# Altium PCB drv8305_instaspin_driver_adapter.PcbDoc
Units mm, origin at the board's own origin, x right, y up, seen from the top; angles counter-clockwise.
Board outline 82 x 47 mm, 2 copper layers (Top Layer, Bottom Layer), stack 1.571 mm thick; 56 components, 19 nets, 62 pads, 329 vias.
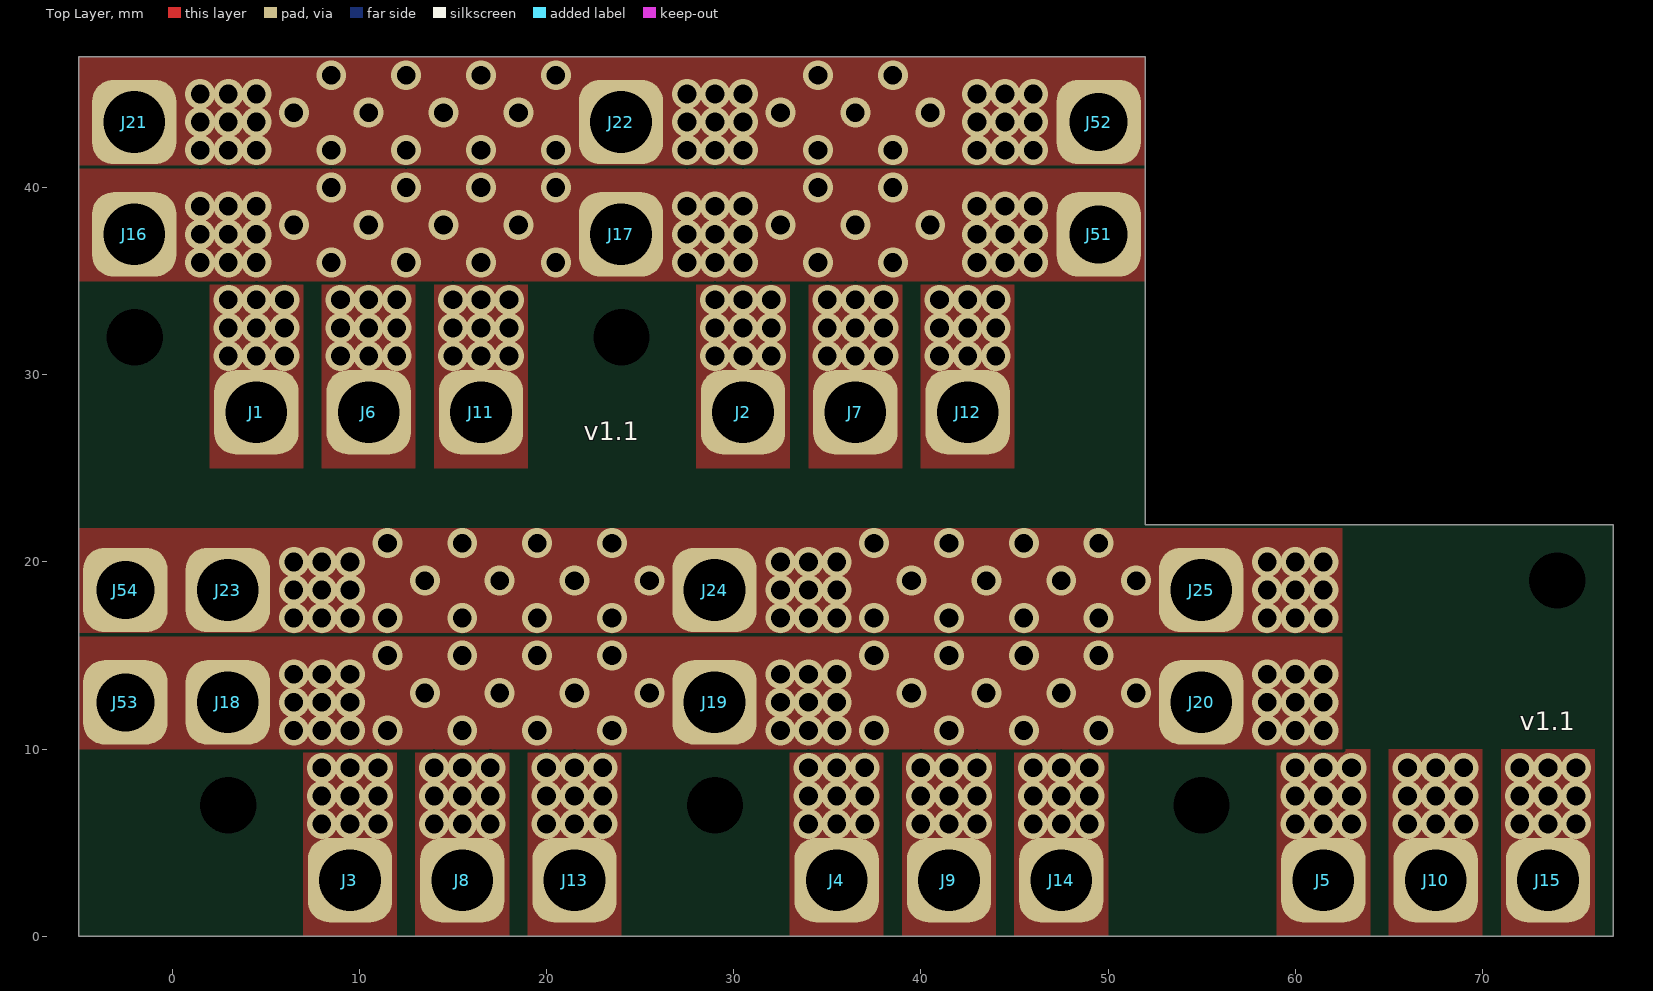
[diagram p0: Top Layer view]
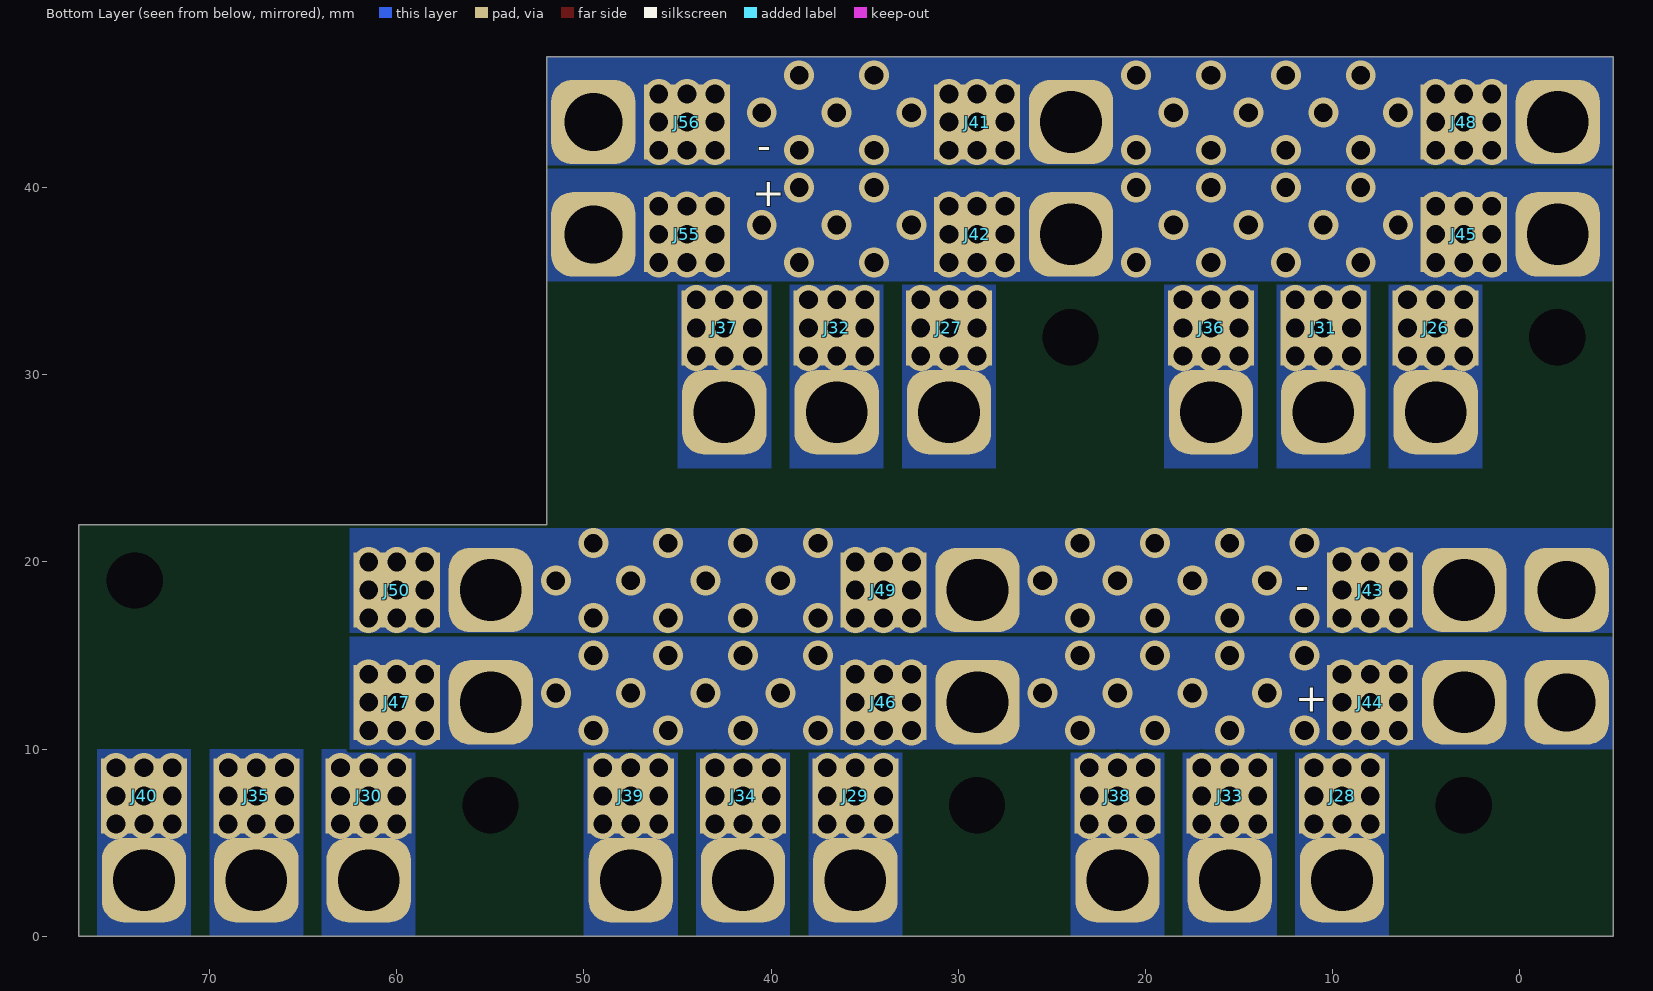
[diagram p1: Bottom Layer view, seen from below]

## Layer stack, top to bottom
Top Solder: solder mask 0.0102, Solder Resist, Dk 3.5
Top Layer: signal copper 0.0356
Dielectric 1: dielectric 1.5, FR-4, Dk 4.8
Bottom Layer: signal copper 0.0356
Bottom Solder: solder mask 0.0102, Solder Resist, Dk 3.5

## Board outline
-5,0 -5,47 52,47 52,22 77,22 77,0

## Design rules (kind name [scope] priority, off if disabled: settings)
Clearance ClearanceKeepOut [All vs OnLayer('Keep-Out Layer')] p1: gap=0.1 ignorepadtopadclearanceinfootprint=FALSE
Clearance [All] p2: gap=0.2 ignorepadtopadclearanceinfootprint=FALSE
HoleSize [All] p1: absolutevalues=TRUE maxlimit=5 minlimit=0.3 maxpercent=80.000 minpercent=20.000
PolygonConnect [All] p1: connectstyle=Direct reliefconductorwidth=0.254 reliefentries=4 polygonreliefangle="90 Angle" airgapwidth=0.254
RoomDefinition drv8305_instaspin_driver_adapter [InComponentClass('drv8305_instaspin_driver_adapter')] p1: confinementstyle=ConfineIn formatcopy=TRUE lockcomponents=FALSE outline -5,0 77,0 77,47 -5,47
RoutingVias [All] p1: holewidth=1 width=1.6 viastyle="Through Hole" minholewidth=0.3 minwidth=0.6 maxholewidth=5 maxwidth=10
SolderMaskExpansion SolderMaskExpansionVia [IsVia And (Not IsTestpoint)] p1: expansion=-5
SolderMaskExpansion [All] p2: expansion=0.1
Width [All] p1: maxlimit=10 minlimit=0.2 preferedwidth=1 minimp=50.000000 maximp=50.000000 favimp=50.000000
29 further rules are at their usual default settings.

## Components (designator, comment, footprint, x,y, rotation, side; value= is the part's Value field where it differs from the comment)
J1 "M1A" 2MM-BULLET-PLUG-VIA 4.5,28 r0 top
J2 "M2A" 2MM-BULLET-PLUG-VIA 30.5,28 r0 top
J3 "M3A" 2MM-BULLET-PLUG-VIA 9.5,3 r0 top
J4 "M4A" 2MM-BULLET-PLUG-VIA 35.5,3 r0 top
J5 "M5A" 2MM-BULLET-PLUG-VIA 61.5,3 r0 top
J6 "M1B" 2MM-BULLET-PLUG-VIA 10.5,28 r0 top
J7 "M2B" 2MM-BULLET-PLUG-VIA 36.5,28 r0 top
J8 "M3B" 2MM-BULLET-PLUG-VIA 15.5,3 r0 top
J9 "M4B" 2MM-BULLET-PLUG-VIA 41.5,3 r0 top
J10 "M5B" 2MM-BULLET-PLUG-VIA 67.5,3 r0 top
J11 "M1C" 2MM-BULLET-PLUG-VIA 16.5,28 r0 top
J12 "M2C" 2MM-BULLET-PLUG-VIA 42.5,28 r0 top
J13 "M3C" 2MM-BULLET-PLUG-VIA 21.5,3 r0 top
J14 "M4C" 2MM-BULLET-PLUG-VIA 47.5,3 r0 top
J15 "M5C" 2MM-BULLET-PLUG-VIA 73.5,3 r0 top
J16 "M1_16V" 2MM-BULLET-PLUG-VIA -2.025,37.5 r0 top
J17 "M2_16V" 2MM-BULLET-PLUG-VIA 23.975,37.5 r0 top
J18 "M3_16V" 2MM-BULLET-PLUG-VIA 2.975,12.5 r0 top
J19 "M4_16V" 2MM-BULLET-PLUG-VIA 28.975,12.5 r0 top
J20 "M5_16V" 2MM-BULLET-PLUG-VIA 54.975,12.5 r0 top
J21 "M1_GND" 2MM-BULLET-PLUG-VIA -2.025,43.5 r0 top
J22 "M2_GND" 2MM-BULLET-PLUG-VIA 23.975,43.5 r0 top
J23 "M3_GND" 2MM-BULLET-PLUG-VIA 2.975,18.5 r0 top
J24 "M4_GND" 2MM-BULLET-PLUG-VIA 28.975,18.5 r0 top
J25 "M5_GND" 2MM-BULLET-PLUG-VIA 54.975,18.5 r0 top
J26 "M1A_OUT" POWER-PAD 4.5,32.5 r270 bottom
J27 "M2A_OUT" POWER-PAD 30.5,32.5 r270 bottom
J28 "M3A_OUT" POWER-PAD 9.5,7.5 r270 bottom
J29 "M4A_OUT" POWER-PAD 35.5,7.5 r90 bottom
J30 "M5A_OUT" POWER-PAD 61.5,7.5 r270 bottom
J31 "M1B_OUT" POWER-PAD 10.5,32.5 r270 bottom
J32 "M2B_OUT" POWER-PAD 36.5,32.5 r270 bottom
J33 "M3B_OUT" POWER-PAD 15.5,7.5 r270 bottom
J34 "M4B_OUT" POWER-PAD 41.5,7.5 r270 bottom
J35 "M5B_OUT" POWER-PAD 67.5,7.5 r270 bottom
J36 "M1C_OUT" POWER-PAD 16.5,32.5 r270 bottom
J37 "M2C_OUT" POWER-PAD 42.5,32.5 r270 bottom
J38 "M3C_OUT" POWER-PAD 21.5,7.5 r270 bottom
J39 "M4C_OUT" POWER-PAD 47.5,7.5 r270 bottom
J40 "M5C_OUT" POWER-PAD 73.5,7.5 r270 bottom
J41 "GND_A_PAD" POWER-PAD 29,43.5 r270 bottom
J42 "16V_A_PAD" POWER-PAD 29,37.5 r270 bottom
J43 "GND_B_PAD" POWER-PAD 8,18.5 r90 bottom
J44 "16V_B_PAD" POWER-PAD 8,12.5 r90 bottom
J45 "16V_B_PAD" POWER-PAD 3,37.5 r270 bottom
J46 "16V_B_PAD" POWER-PAD 34,12.5 r270 bottom
J47 "16V_B_PAD" POWER-PAD 60,12.5 r270 bottom
J48 "GND_B_PAD" POWER-PAD 3,43.5 r270 bottom
J49 "GND_B_PAD" POWER-PAD 34,18.5 r270 bottom
J50 "GND_B_PAD" POWER-PAD 60,18.5 r270 bottom
J51 "A+" 2MM-BANANA-VIA 49.5,37.5 r0 top
J52 "A-" 2MM-BANANA-VIA 49.5,43.5 r0 top
J53 "B+" 2MM-BANANA-VIA -2.5,12.5 r0 top
J54 "B-" 2MM-BANANA-VIA -2.5,18.5 r0 top
J55 "A+_PAD" POWER-PAD 44.5,37.5 r270 bottom
J56 "A-_PAD" POWER-PAD 44.5,43.5 r270 bottom

## Footprints (in the part's own frame and the unit in brackets; to place one, negate y for a bottom-side part, rotate by r counter-clockwise, add the part's x,y. Pads: shape width x height; smd on the part's side, far side on the other; paste and mask are expansions set on the pad)
2MM-BANANA-VIA [mm]
  rrect50% 4.5x4.5 hole 3.1: 1(0,0)
  body extent -2,-2 2,2, height 1.51
2MM-BULLET-PLUG-VIA [mm]
  rrect50% 4.5x4.5 hole 3.3: 1(0,0)
POWER-PAD [mm]
  rect 4x4.6 smd: 1(0,0)

## Part data
J1 J2 J3 J4 J5 J6 J7 J8 J9 J10 J11 J12 J13 J14 J15 J16 J17 J18 J19 J20 J21 J22 J23 J24 J25 J26 J27 J28 J29 J30 J31 J32 J33 J34 J35 J36 J37 J38 J39 J40 J41 J42 J43 J44 J45 J46 J47 J48 J49 J50 J51 J52 J53 J54 J55 J56: library part HEADER-1

## Free pads (board coordinates)
  round 0 hole 3 unplated: 0(3,7) 1(29,7) 2(55,7) 2(74,19) 3(-2,32) 4(24,32)

## Via types
v1: diameter 1.6, hole 1, Top Layer to Bottom Layer, 329 vias

## Nets (pads, with @x,y where several pads share a name; then routed paths per layer and width w, separated by ;. In a path a pad name is that pad's centre, name@x,y a point inside that pad or via, vN(x,y) a via of type N, cw(c..) or ccw(c..) an arc to the next point about the centre after c; other vN are vias at no path point)
16V_A: J16.1 J17.1 J42.1 J45.1 J51.1 J55.1
  other v1: 1.5,36 3,36 4.5,36 8.5,36 12.5,36 16.5,36 20.5,36 27.5,36 29,36 30.5,36 34.5,36 38.5,36 43,36 44.5,36 46,36 1.5,37.5 3,37.5 4.5,37.5 27.5,37.5 29,37.5 30.5,37.5 43,37.5 44.5,37.5 46,37.5 6.5,38 10.5,38 14.5,38 18.5,38 32.5,38 36.5,38 40.5,38 1.5,39 3,39 4.5,39 27.5,39 29,39 30.5,39 43,39 44.5,39 46,39 8.5,40 12.5,40 16.5,40 20.5,40 34.5,40 38.5,40
16V_B: J18.1 J19.1 J20.1 J44.1 J46.1 J47.1 J53.1
  other v1: 6.5,11 8,11 9.5,11 11.5,11 15.5,11 19.5,11 23.5,11 32.5,11 34,11 35.5,11 37.5,11 41.5,11 45.5,11 49.5,11 58.5,11 60,11 61.5,11 6.5,12.5 8,12.5 9.5,12.5 32.5,12.5 34,12.5 35.5,12.5 58.5,12.5 60,12.5 61.5,12.5 13.5,13 17.5,13 21.5,13 25.5,13 39.5,13 43.5,13 47.5,13 51.5,13 6.5,14 8,14 9.5,14 32.5,14 34,14 35.5,14 58.5,14 60,14 61.5,14 11.5,15 15.5,15 19.5,15 23.5,15 37.5,15 41.5,15 45.5,15 49.5,15
GND_A: J21.1 J22.1 J41.1 J48.1 J52.1 J56.1
  other v1: 1.5,42 3,42 4.5,42 8.5,42 12.5,42 16.5,42 20.5,42 27.5,42 29,42 30.5,42 34.5,42 38.5,42 43,42 44.5,42 46,42 1.5,43.5 3,43.5 4.5,43.5 27.5,43.5 29,43.5 30.5,43.5 43,43.5 44.5,43.5 46,43.5 6.5,44 10.5,44 14.5,44 18.5,44 32.5,44 36.5,44 40.5,44 1.5,45 3,45 4.5,45 27.5,45 29,45 30.5,45 43,45 44.5,45 46,45 8.5,46 12.5,46 16.5,46 20.5,46 34.5,46 38.5,46
GND_B: J23.1 J24.1 J25.1 J43.1 J49.1 J50.1 J54.1
  other v1: 6.5,17 8,17 9.5,17 11.5,17 15.5,17 19.5,17 23.5,17 32.5,17 34,17 35.5,17 37.5,17 41.5,17 45.5,17 49.5,17 58.5,17 60,17 61.5,17 6.5,18.5 8,18.5 9.5,18.5 32.5,18.5 34,18.5 35.5,18.5 58.5,18.5 60,18.5 61.5,18.5 13.5,19 17.5,19 21.5,19 25.5,19 39.5,19 43.5,19 47.5,19 51.5,19 6.5,20 8,20 9.5,20 32.5,20 34,20 35.5,20 58.5,20 60,20 61.5,20 11.5,21 15.5,21 19.5,21 23.5,21 37.5,21 41.5,21 45.5,21 49.5,21
NetJ1_1: J1.1 J26.1
  other v1: 3,31 4.5,31 6,31 3,32.5 4.5,32.5 6,32.5 3,34 4.5,34 6,34
NetJ2_1: J2.1 J27.1
  other v1: 29,31 30.5,31 32,31 29,32.5 30.5,32.5 32,32.5 29,34 30.5,34 32,34
NetJ3_1: J3.1 J28.1
  other v1: 8,6 9.5,6 11,6 8,7.5 9.5,7.5 11,7.5 8,9 9.5,9 11,9
NetJ4_1: J4.1 J29.1
  other v1: 34,6 35.5,6 37,6 34,7.5 35.5,7.5 37,7.5 34,9 35.5,9 37,9
NetJ5_1: J5.1 J30.1
  other v1: 60,6 61.5,6 63,6 60,7.5 61.5,7.5 63,7.5 60,9 61.5,9 63,9
NetJ6_1: J6.1 J31.1
  other v1: 9,31 10.5,31 12,31 9,32.5 10.5,32.5 12,32.5 9,34 10.5,34 12,34
NetJ7_1: J7.1 J32.1
  other v1: 35,31 36.5,31 38,31 35,32.5 36.5,32.5 38,32.5 35,34 36.5,34 38,34
NetJ8_1: J8.1 J33.1
  other v1: 14,6 15.5,6 17,6 14,7.5 15.5,7.5 17,7.5 14,9 15.5,9 17,9
NetJ9_1: J9.1 J34.1
  other v1: 40,6 41.5,6 43,6 40,7.5 41.5,7.5 43,7.5 40,9 41.5,9 43,9
NetJ10_1: J10.1 J35.1
  other v1: 66,6 67.5,6 69,6 66,7.5 67.5,7.5 69,7.5 66,9 67.5,9 69,9
NetJ11_1: J11.1 J36.1
  other v1: 15,31 16.5,31 18,31 15,32.5 16.5,32.5 18,32.5 15,34 16.5,34 18,34
NetJ12_1: J12.1 J37.1
  other v1: 41,31 42.5,31 44,31 41,32.5 42.5,32.5 44,32.5 41,34 42.5,34 44,34
NetJ13_1: J13.1 J38.1
  other v1: 20,6 21.5,6 23,6 20,7.5 21.5,7.5 23,7.5 20,9 21.5,9 23,9
NetJ14_1: J14.1 J39.1
  other v1: 46,6 47.5,6 49,6 46,7.5 47.5,7.5 49,7.5 46,9 47.5,9 49,9
NetJ15_1: J15.1 J40.1
  other v1: 72,6 73.5,6 75,6 72,7.5 73.5,7.5 75,7.5 72,9 73.5,9 75,9

## Polygon pours and split planes (outlines as drawn)
16V_A on Bottom Layer "16V_A_L02_P002" (solid, remove dead copper, pour order 2): -5,35 52,35 52,41 -5,41
NetJ1_1 on Bottom Layer "NETJ1_1_L02_P036" (solid, remove dead copper, pour order 36): 2,35 7,35 7,25 2,25
NetJ6_1 on Bottom Layer "NETJ6_1_L02_P035" (solid, remove dead copper, pour order 35): 8,35 13,35 13,25 8,25
NetJ11_1 on Bottom Layer "NETJ11_1_L02_P032" (solid, remove dead copper, pour order 32): 14,35 19,35 19,25 14,25
NetJ12_1 on Bottom Layer "NETJ12_1_L02_P031" (solid, remove dead copper, pour order 31): 40,35 45,35 45,25 40,25
NetJ7_1 on Bottom Layer "NETJ7_1_L02_P028" (solid, remove dead copper, pour order 28): 34,35 39,35 39,25 34,25
NetJ2_1 on Bottom Layer "NETJ2_1_L02_P027" (solid, remove dead copper, pour order 27): 28,35 33,35 33,25 28,25
NetJ15_1 on Bottom Layer "NETJ15_1_L02_P024" (solid, remove dead copper, pour order 24): 71,10 76,10 76,0 71,0
NetJ10_1 on Bottom Layer "NETJ10_1_L02_P023" (solid, remove dead copper, pour order 23): 65,10 70,10 70,0 65,0
NetJ5_1 on Bottom Layer "NETJ5_1_L02_P020" (solid, remove dead copper, pour order 20): 59,10 64,10 64,0 59,0
NetJ14_1 on Bottom Layer "NETJ14_1_L02_P019" (solid, remove dead copper, pour order 19): 45,10 50,10 50,0 45,0
NetJ9_1 on Bottom Layer "NETJ9_1_L02_P016" (solid, remove dead copper, pour order 16): 39,10 44,10 44,0 39,0
NetJ4_1 on Bottom Layer "NETJ4_1_L02_P014" (solid, remove dead copper, pour order 14): 33,0 33,10 38,10 38,0
NetJ3_1 on Bottom Layer "NETJ3_1_L02_P013" (solid, remove dead copper, pour order 13): 7,0 7,10 12,10 12,0
NetJ8_1 on Bottom Layer "NETJ8_1_L02_P012" (solid, remove dead copper, pour order 12): 13,0 13,10 18,10 18,0
NetJ13_1 on Bottom Layer "NETJ13_1_L02_P011" (solid, remove dead copper, pour order 11): 19,0 19,10 24,10 24,0
GND_A on Bottom Layer "GND_A_L02_P007" (solid, remove dead copper, pour order 7): -5,41 52,41 52,47 -5,47
GND_B on Bottom Layer "GND_B_L02_P004" (solid, remove dead copper, pour order 4): -5,16 62.5,16 62.5,21.8 -5,21.8
16V_B on Bottom Layer "16V_B_L02_P000" (solid, remove dead copper, pour order 0): -5,10 62.5,10 62.5,16 -5,16
16V_A on Top Layer "16V_A_L01_P003" (solid, remove dead copper, pour order 3): -5,35 52,35 52,41 -5,41
NetJ1_1 on Top Layer "NETJ1_1_L01_P037" (solid, remove dead copper, pour order 37): 2,35 7,35 7,25 2,25
NetJ6_1 on Top Layer "NETJ6_1_L01_P034" (solid, remove dead copper, pour order 34): 8,35 13,35 13,25 8,25
NetJ11_1 on Top Layer "NETJ11_1_L01_P033" (solid, remove dead copper, pour order 33): 14,35 19,35 19,25 14,25
NetJ12_1 on Top Layer "NETJ12_1_L01_P030" (solid, remove dead copper, pour order 30): 40,35 45,35 45,25 40,25
NetJ7_1 on Top Layer "NETJ7_1_L01_P029" (solid, remove dead copper, pour order 29): 34,35 39,35 39,25 34,25
NetJ2_1 on Top Layer "NETJ2_1_L01_P026" (solid, remove dead copper, pour order 26): 28,35 33,35 33,25 28,25
NetJ15_1 on Top Layer "NETJ15_1_L01_P025" (solid, remove dead copper, pour order 25): 71,10 76,10 76,0 71,0
NetJ10_1 on Top Layer "NETJ10_1_L01_P022" (solid, remove dead copper, pour order 22): 65,10 70,10 70,0 65,0
NetJ5_1 on Top Layer "NETJ5_1_L01_P021" (solid, remove dead copper, pour order 21): 59,10 64,10 64,0 59,0
NetJ14_1 on Top Layer "NETJ14_1_L01_P018" (solid, remove dead copper, pour order 18): 45,10 50,10 50,0 45,0
NetJ9_1 on Top Layer "NETJ9_1_L01_P017" (solid, remove dead copper, pour order 17): 39,10 44,10 44,0 39,0
NetJ4_1 on Top Layer "NETJ4_1_L01_P015" (solid, remove dead copper, pour order 15): 33,0 38,0 38,10 33,10
NetJ13_1 on Top Layer "NETJ13_1_L01_P010" (solid, remove dead copper, pour order 10): 19,0 19,10 24,10 24,0
NetJ8_1 on Top Layer "NETJ8_1_L01_P009" (solid, remove dead copper, pour order 9): 13,0 13,10 18,10 18,0
NetJ3_1 on Top Layer "NETJ3_1_L01_P008" (solid, remove dead copper, pour order 8): 7,0 12,0 12,10 7,10
GND_A on Top Layer "GND_A_L01_P006" (solid, remove dead copper, pour order 6): -5,47 52,47 52,41 -5,41
GND_B on Top Layer "GND_B_L01_P005" (solid, remove dead copper, pour order 5): -5,16 62.5,16 62.5,21.8 -5,21.8
16V_B on Top Layer "16V_B_L01_P001" (solid, remove dead copper, pour order 1): -5,10 62.5,10 62.5,16 -5,16

## Silkscreen, mask and mechanical layers (free items; w line width, h text height)
Top Overlay:
  text "v1.1" at 22,26.5 h1
  text "v1.1" at 72,11 h1
Bottom Overlay:
  text "-" at 40,41.5 h1.52
  text "+" at 41,39 h1.52
  text "-" at 12,18 h1.52
  text "+" at 12,12 h1.52
Mechanical 1:
  circle w0.1: c49.5,43.5 r1.55
  circle w0.1: c49.5,37.5 r1.55
  circle w0.1: c23.975,43.5 r1.65
  circle w0.1: c23.975,37.5 r1.65
  circle w0.1: c24,32 r1.5
  circle w0.1: c30.5,28 r1.65
  circle w0.1: c36.5,28 r1.65
  circle w0.1: c42.5,28 r1.65
  circle w0.1: c-2.025,43.5 r1.65
  circle w0.1: c-2.025,37.5 r1.65
  circle w0.1: c-2,32 r1.5
  circle w0.1: c4.5,28 r1.65
  circle w0.1: c10.5,28 r1.65
  circle w0.1: c16.5,28 r1.65
  circle w0.1: c54.975,12.5 r1.65
  circle w0.1: c55,7 r1.5
  circle w0.1: c61.5,3 r1.65
  circle w0.1: c67.5,3 r1.65
  circle w0.1: c73.5,3 r1.65
  circle w0.1: c54.975,18.5 r1.65
  circle w0.1: c-2.5,12.5 r1.55
  circle w0.1: c-2.5,18.5 r1.55
  circle w0.1: c74,19 r1.5
  circle w0.1: c28.975,12.5 r1.65
  circle w0.1: c29,7 r1.5
  circle w0.1: c35.5,3 r1.65
  circle w0.1: c41.5,3 r1.65
  circle w0.1: c47.5,3 r1.65
  circle w0.1: c28.975,18.5 r1.65
  circle w0.1: c2.975,18.5 r1.65
  circle w0.1: c2.975,12.5 r1.65
  circle w0.1: c3,7 r1.5
  circle w0.1: c9.5,3 r1.65
  circle w0.1: c15.5,3 r1.65
  circle w0.1: c21.5,3 r1.65
  lines w0.1: -5,4 4,4 4,0 77,0 77,22 -5,22 -5,4 ; -5,25 -5,47 52,47 52,34.5 47,34.5 47,25 -5,25
Mechanical 13:
  the board outline again, w0.1